# EAGLE board Tugas Day o- William Chandra (EAGLE 7.6.0)
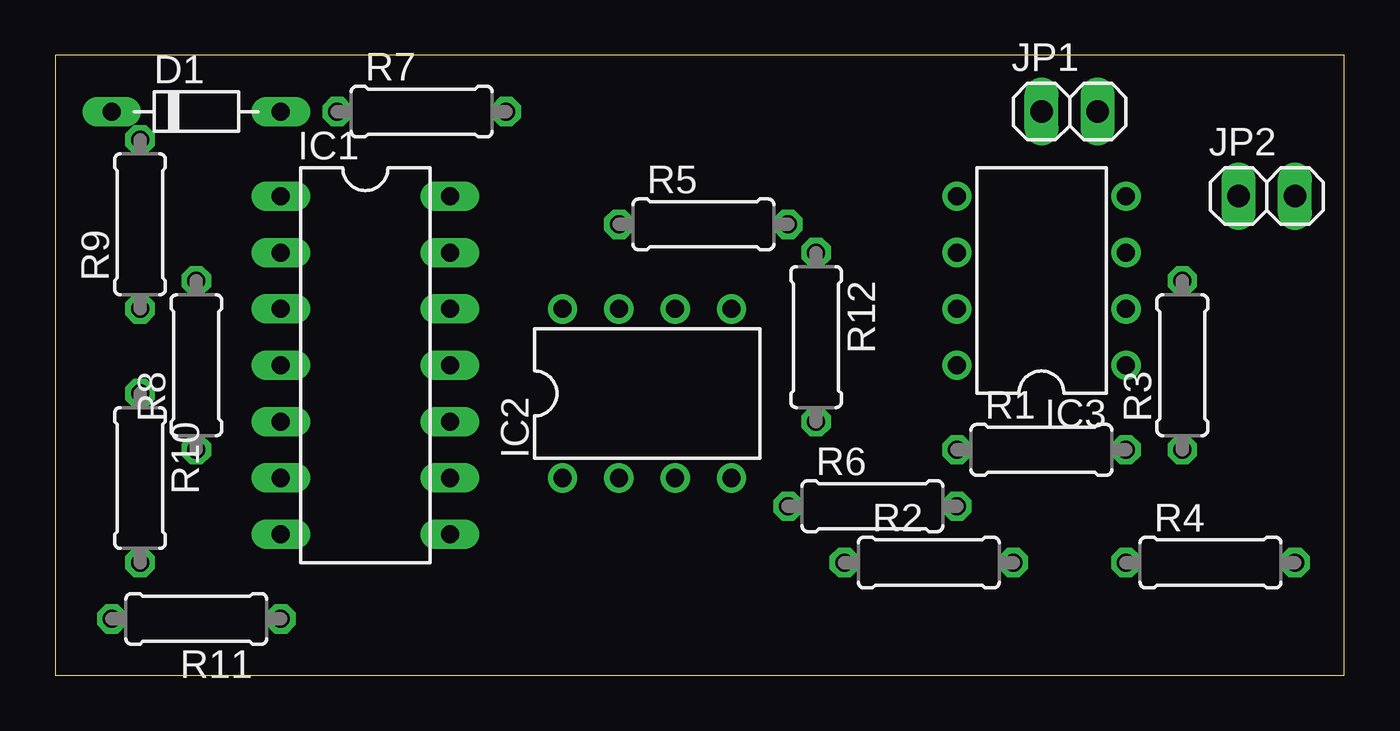
[diagram p0: board, top side]
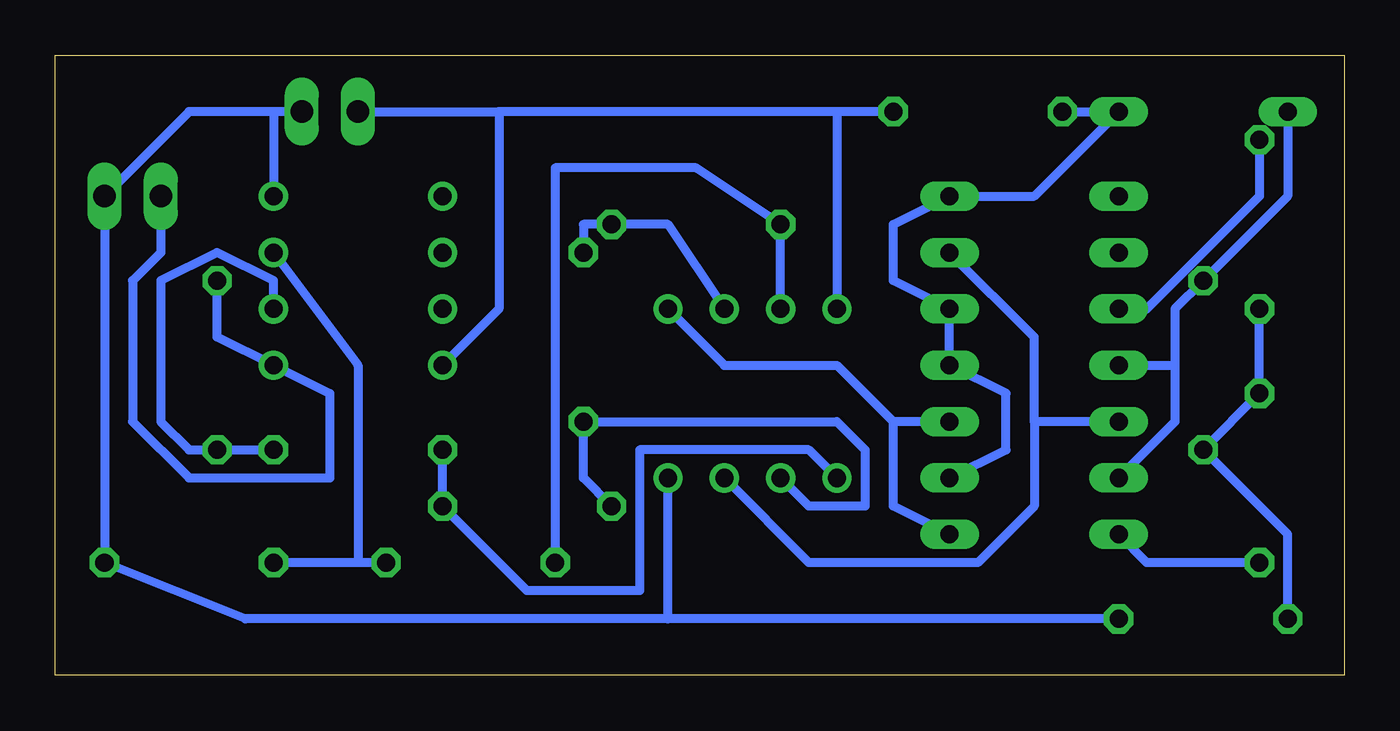
[diagram p1: board, bottom side, seen from below]

Size 58.09 x 27.93 mm. Coordinates in mm from the lower left corner, seen from the top.
Outline: 0,0 58.09,0 58.09,27.93 0,27.93 0,0
Copper layers (1*16): Top 0.035mm / dielectric 1.5mm / Bottom 0.035mm
Design rules "default": minimum track width 10mil, minimum drill 24mil, track to track 8mil, track to pad 8mil, pad to pad 8mil, via to via 8mil, smd to smd 8mil, copper to edge 40mil, drill to drill 8mil, minimum pad ring 10mil, minimum via ring 8mil, stop-mask expansion 4mil, vias tented up to drill 0mil, thermal gap 10mil

## Footprints (pad centres in the part's own frame; a part is rotated, then mirrored left to right if it is on the bottom)
D-7.5 = drill 0.813 long: A 3.81,0; C -3.81,0
DIL14 = drill 0.813 long: 1 -7.62,-3.81; 2 -5.08,-3.81; 3 -2.54,-3.81; 4 0,-3.81; 5 2.54,-3.81; 6 5.08,-3.81; 7 7.62,-3.81; 8 7.62,3.81; 9 5.08,3.81; 10 2.54,3.81; 11 0,3.81; 12 -2.54,3.81; 13 -5.08,3.81; 14 -7.62,3.81
DIL08 = drill 0.813 pad 1.27: 1 -3.81,-3.81; 2 -1.27,-3.81; 3 1.27,-3.81; 4 3.81,-3.81; 5 3.81,3.81; 6 1.27,3.81; 7 -1.27,3.81; 8 -3.81,3.81
1X02 = drill 1.016 long: 1 -1.27,0; 2 1.27,0
0207/7 = drill 0.813 octagon: 1 -3.81,0; 2 3.81,0

## Placement (x,y rotation side)
D1  [D-7.5]  6.35,25.4 0 top
IC1  [DIL14]  13.97,13.97 270 top
IC2  LM358N  [DIL08]  26.67,12.7 0 top
IC3  LM358N  [DIL08]  44.45,17.78 90 top
JP1  [1X02]  45.72,25.4 0 top
JP2  [1X02]  54.61,21.59 0 top
R1  100k  [0207/7]  44.45,10.16 0 top
R2  100k  [0207/7]  39.37,5.08 0 top
R3  100k  [0207/7]  50.8,13.97 90 top
R4  100k  [0207/7]  52.07,5.08 0 top
R5  100k  [0207/7]  29.21,20.32 0 top
R6  100k  [0207/7]  36.83,7.62 0 top
R7  60k  [0207/7]  16.51,25.4 0 top
R8  12k  [0207/7]  6.35,13.97 90 top
R9  100k  [0207/7]  3.81,20.32 90 top
R10  200k  [0207/7]  3.81,8.89 270 top
R11  60k  [0207/7]  6.35,2.54 180 top
R12  1k  [0207/7]  34.29,15.24 270 top

## Library data of the parts
D1 = diode
IC1 = ic-package
IC2 IC3 = linear
JP1 JP2 = pinhead
R1-R12 = resistor

## Nets
GND: IC2.4 IC3.4 JP1.2 JP2.2 R4.2 R11.1
N$1: IC3.3 R2.2 R4.1
N$2: IC3.2 R1.2 R3.1
N$3: IC2.1 R1.1 R6.2
N$4: IC2.2 R6.1 R12.2
N$5: IC2.6 R5.2 R12.1
N$6: IC2.7 R2.1 R5.1
N$7: R8.1 R9.1 R10.1 R11.2
N$8: D1.C IC1.4 IC1.6 R8.2
N$9: IC1.7 R10.2
N$10: IC1.3 R9.2
N$11: D1.A IC1.9 IC1.11 IC1.12 IC1.14 R7.1
N$12: IC1.5 IC1.13 IC2.3
N$13: IC1.8 IC1.10 IC2.5
VCC: IC2.8 IC3.8 JP1.1 R7.2
VOUT: IC3.1 JP2.1 R3.2

## Tracks (layer width: path | path; a pad name or v marks a point on that pad's centre or on a via)
GND
  Bottom 0.406: R11.1 30.48,2.54 | 30.48,2.54 49.53,2.54 R4.2 JP2.2 52.07,25.4 JP1.2 48.26,25.4 IC3.4 | 30.48,2.54 IC2.4
N$1
  Bottom 0.406: IC3.3 44.45,13.97 44.45,5.08 | 44.45,5.08 R4.1 | R2.2 44.45,5.08
N$2
  Bottom 0.406: R1.2 R3.1 52.07,10.16 53.34,11.43 53.34,17.78 50.8,19.05 48.26,17.78 IC3.2
N$3
  Bottom 0.406: R1.1 R6.2 36.83,3.81 31.75,3.81 31.75,10.16 24.13,10.16 IC2.1
N$4
  Bottom 0.406: R6.1 34.29,8.89 R12.2 22.86,11.43 21.59,10.16 21.59,7.62 24.13,7.62 IC2.2
N$5
  Bottom 0.406: R12.1 34.29,20.32 R5.2 30.48,20.32 IC2.6
N$6
  Bottom 0.406: IC2.7 R5.1 29.21,22.86 35.56,22.86 R2.1
N$7
  Bottom 0.406: R9.1 R10.1 R8.1 2.54,6.35 R11.2
N$8
  Bottom 0.406: IC1.4 7.62,13.97 | 7.62,13.97 7.62,11.43 IC1.6 | D1.C 2.54,21.59 R8.2 7.62,16.51 7.62,13.97
N$9
  Bottom 0.406: R10.2 8.89,5.08 IC1.7
N$10
  Bottom 0.406: IC1.3 8.89,16.51 3.81,21.59 R9.2
N$11
  Bottom 0.406: R7.1 D1.A 13.97,21.59 IC1.14 20.32,20.32 20.32,17.78 IC1.12 IC1.11 15.24,12.7 15.24,10.16 IC1.9
N$12
  Bottom 0.406: IC1.5 13.97,11.43 | 13.97,11.43 13.97,15.24 IC1.13 | IC2.3 24.13,5.08 16.51,5.08 13.97,7.62 13.97,11.43
N$13
  Bottom 0.406: IC1.10 20.32,11.43 | IC1.8 20.32,7.62 20.32,11.43 | IC2.5 27.94,13.97 22.86,13.97 20.32,11.43
VCC
  Bottom 0.406: R7.2 22.86,25.4 | 22.86,25.4 IC2.8 | 22.86,25.4 38.1,25.4 | 38.1,25.4 38.1,16.51 IC3.8 | JP1.1 38.1,25.4
VOUT
  Bottom 0.406: JP2.1 53.34,19.05 54.61,17.78 54.61,11.43 52.07,8.89 45.72,8.89 45.72,12.7 IC3.1 50.8,15.24 R3.2